# Altium PCB PCB for XH Connectors_2023-09-30.pcbdoc
Units mm, origin at the board's own origin, x right, y up, seen from the top; angles counter-clockwise.
Board outline 95.92 x 79.69 mm, 2 copper layers (Top Layer, Bottom Layer); 19 components, 37 nets, 96 pads, 4 vias.
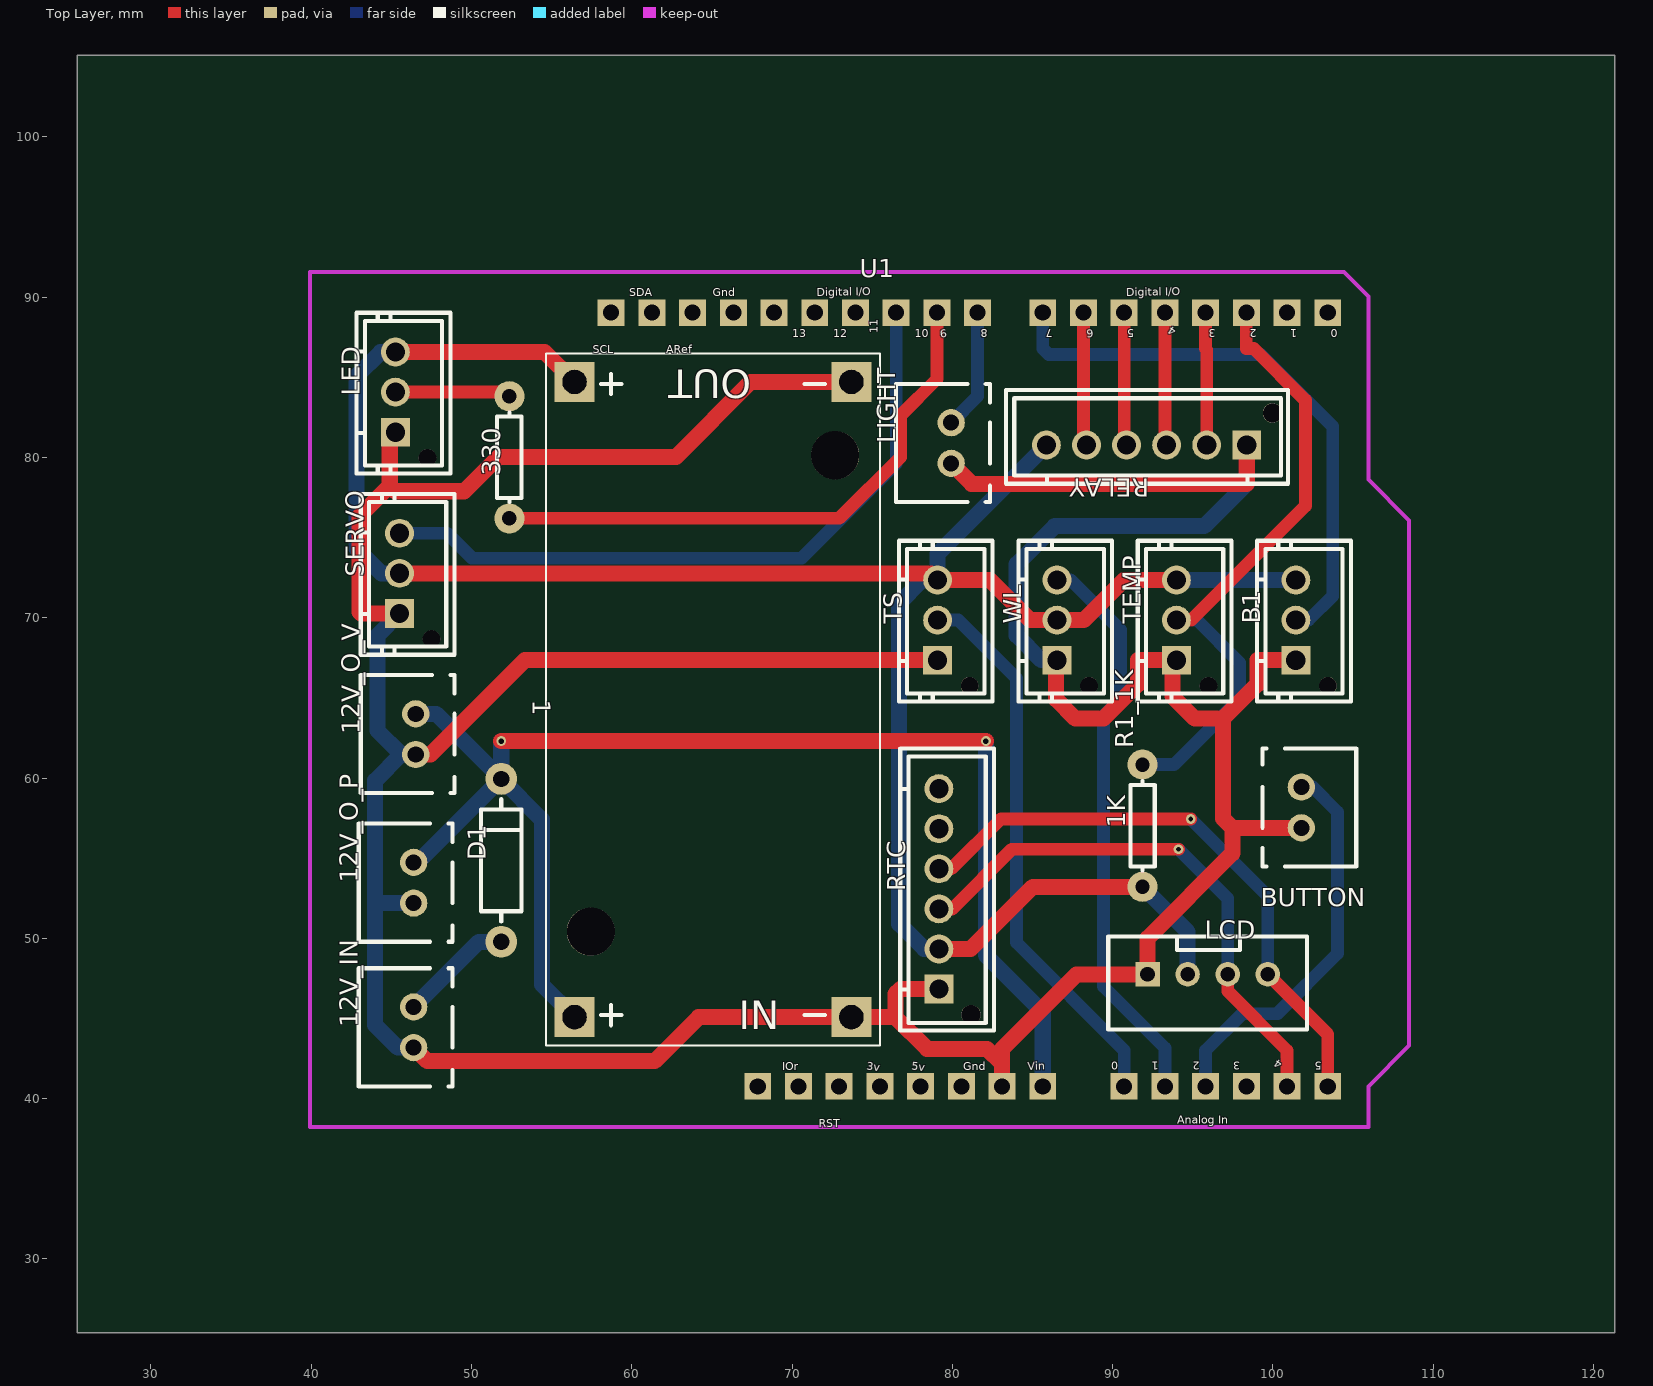
[diagram p0: Top Layer view]
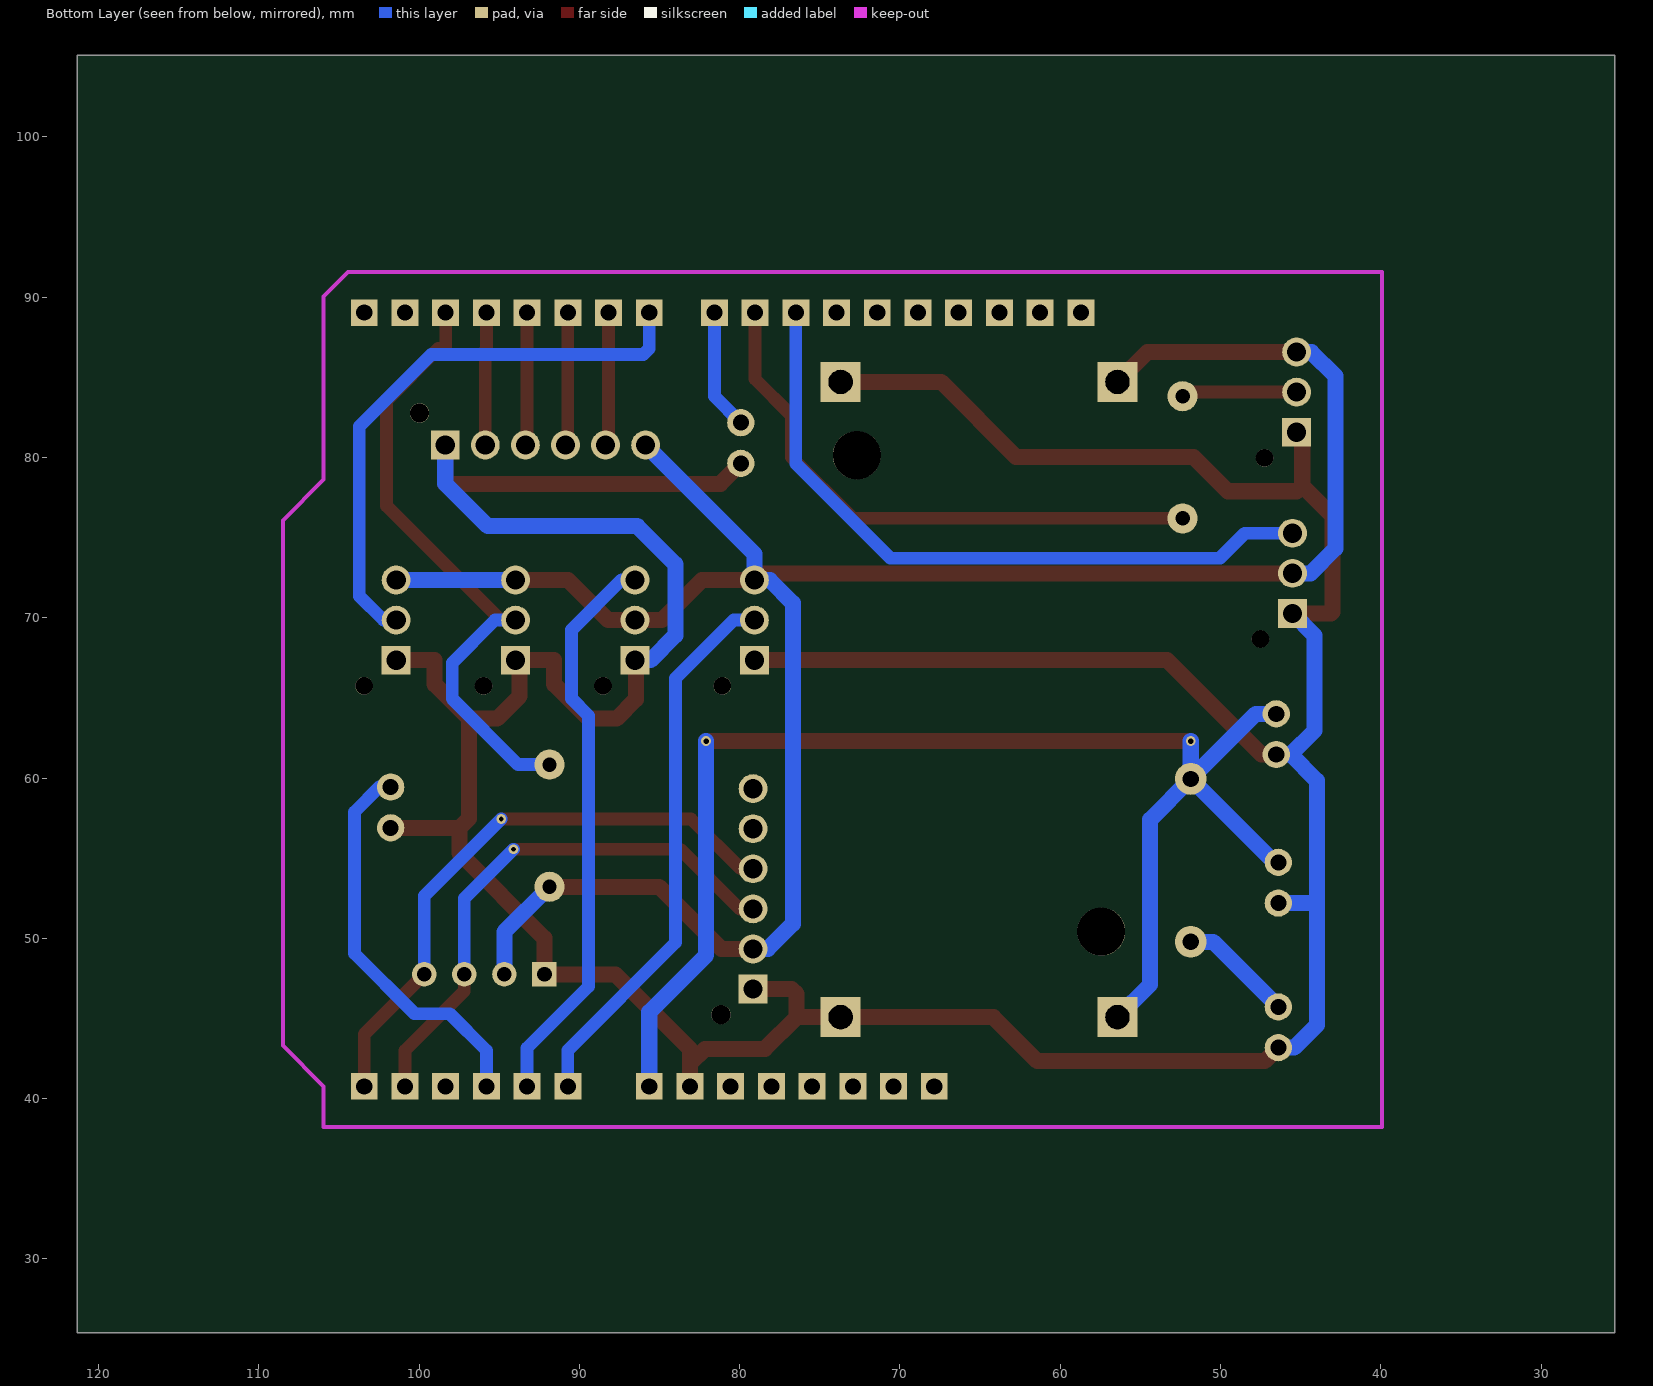
[diagram p1: Bottom Layer view, seen from below]

## Layer stack, top to bottom
Top Layer: signal copper (thickness not stored)
Dielectric: dielectric 0.32, FR-4, Dk 4.8
Bottom Layer: signal copper (thickness not stored)

## Board outline
121.323,25.4 25.4,25.4 25.4,105.093 121.323,105.093

## Components (designator, comment, footprint, x,y, rotation, side; value= is the part's Value field where it differs from the comment)
1 "DC-DC-STEP-DOWN-LM2596" DC-DC-STEP-DOWN-LM2596 65.062,64.897 r90 top
12V_IN "12V Power Supply" CONN-TH_B2B-XH-A-LF-SN 46.393,44.45 r90 top
12V_O_P "B2B-XH-A (LF)(SN)" CONN-TH_B2B-XH-A-LF-SN 46.393,53.467 r90 top
12V_O_V "B2B-XH-A (LF)(SN)" CONN-TH_B2B-XH-A-LF-SN 46.52,62.738 r90 top
330 "1k" R_AXIAL-0.3 52.362,80.01 r90 top
B1 "B3B-XH-AM-(LF)(SN)" CONN-TH_3P-P2.50_B3B-XH-AM-LF-SN 101.426,69.85 r90 top
BUTTON "PUSH Button" CONN-TH_B2B-XH-A-LF-SN 101.765,58.166 r270 top
D1 "DIODE" DIODE-1N4001 51.854,54.864 r90 top
LCD "B4B-XH-A-G" CONN-TH_B4B-XH-A-G 95.923,47.752 r0 top
LED "B3B-XH-AM-(LF)(SN)" CONN-TH_3P-P2.50_B3B-XH-AM-LF-SN 45.25,84.074 r90 top
LIGHT "B2B-XH-A (LF)(SN)" CONN-TH_B2B-XH-A-LF-SN 79.921,80.899 r90 top
R1_1K "1k" R_AXIAL-0.3 91.859,57.023 r90 top
RELAY "B6B-XH-AM" CONN-TH_6P-P2.50_B6B-XH-AM-LF-SN 92.113,80.772 r180 top
RTC "B6B-XH-AM" CONN-TH_6P-P2.50_B6B-XH-AM-LF-SN 79.159,53.086 r90 top
SERVO "B3B-XH-AM-(LF)(SN)" CONN-TH_3P-P2.50_B3B-XH-AM-LF-SN 45.504,72.771 r90 top
TEMP "B3B-XH-AM-(LF)(SN)" CONN-TH_3P-P2.50_B3B-XH-AM-LF-SN 93.976,69.85 r90 top
TS "B3B-XH-AM-(LF)(SN)" CONN-TH_3P-P2.50_B3B-XH-AM-LF-SN 79.074,69.85 r90 top
U1 "ARDUINOR3-DIMENSION" ARDUINOR3 81.064,64.897 r0 top
WL "B3B-XH-AM-(LF)(SN)" CONN-TH_3P-P2.50_B3B-XH-AM-LF-SN 86.525,69.85 r90 top

## Footprints (in the part's own frame and the unit in brackets; to place one, negate y for a bottom-side part, rotate by r counter-clockwise, add the part's x,y. Pads: shape width x height; smd on the part's side, far side on the other; paste and mask are expansions set on the pad)
ARDUINOR3 [mil]
  rect 66x66 hole 39.4: 3V(-220,-950) 5V(-120,-950) A0(380,-950) A1(480,-950) A2(580,-950) A3(680,-950) A4(780,-950) A5(880,-950) AREF(-680,950) D0(880,950) D1(780,950) D2(680,950) D3(580,950) D4(480,950) D5(380,950) D6(280,950) D7(180,950) D8(20,950) D9(-80,950) D10(-180,950) D11(-280,950) D12(-380,950) D13(-480,950) GND(-580,950) GND1(80,-950) GND2(-20,-950) IOREF(-420,-950) RESERVED(-520,-950) RESET(-320,-950) SCL(-880,950) SDA(-780,950) VIN(180,-950)
  Keep-Out Layer lines w10: -1620,-1050 980,-1050 980,-950 1080,-850 1080,440 980,540 980,990 920,1050 -1620,1050 -1620,-1050
CONN-TH_3P-P2.50_B3B-XH-AM-LF-SN [mm]
  rect 1.8x1.8 hole 1.2: 1(-2.5,0)
  round 1.8 hole 1.2: 2(0,0) 3(2.5,0)
  round 1.1 hole 1.1 unplated: ""(-4.1,-2)
  silkscreen extent -5.08,-3.43 4.95,2.41
CONN-TH_6P-P2.50_B6B-XH-AM-LF-SN [mm]
  rect 1.8x1.8 hole 1.2: 1(-6.25,0)
  round 1.8 hole 1.2: 2(-3.75,0) 3(-1.25,0) 4(1.25,0) 5(3.75,0) 6(6.25,0)
  round 1.2 hole 1.2 unplated: ""(-7.85,-2)
  silkscreen extent -8.83,-3.43 8.76,2.41
CONN-TH_B2B-XH-A-LF-SN [mm]
  round 1.7 hole 1: 1(1.27,0) 2(-1.27,0)
  silkscreen extent -3.68,-2.41 3.68,3.43
CONN-TH_B4B-XH-A-G [mil]
  rect 60x60 hole 36: 1(-147.64,0)
  round 60 hole 36: 2(-49.22,0) 3(49.21,0) 4(147.64,0)
  silkscreen extent -244,-136 244,93
DC-DC-STEP-DOWN-LM2596 [mil]
  rect 98.42x98.42 hole 59.06: IN+(-780,340) IN-(-780,-340) OUT+(780,340) OUT-(780,-340)
  round 118.1 hole 118.1 unplated: ""(-570,300) ""(600,-300)
  silkscreen extent -850,-410 850,410
DIODE-1N4001 [mil]
  round 78 hole 39.4: A(-200,0) C(200,0)
  silkscreen extent -150,-50 150,50
R_AXIAL-0.3 [mil]
  round 74 hole 35.4: 1(-150,0) 2(150,0)
  silkscreen extent -110,-30 110,30

## Via types
v1: diameter 0.61, hole 0.305, Top Layer to Bottom Layer, tented both sides, 2 vias
v2: diameter 0.61, hole 0.35, Top Layer to Bottom Layer, tented both sides, 2 vias

## Nets (pads, with @x,y where several pads share a name; then routed paths per layer and width w, separated by ;. In a path a pad name is that pad's centre, name@x,y a point inside that pad or via, vN(x,y) a via of type N, cw(c..) or ccw(c..) an arc to the next point about the centre after c; other vN are vias at no path point)
12V_IN_1: 12V_IN.1 D1.A | length 7.1
  Bottom Layer w1: 12V_IN.1 50.457,49.784 D1.A
330_1: 330.1 U1.D9 | length 35.9
  Top Layer w0.8: 330.1 72.938,76.2 76.773,80.035 76.773,82.627 79.032,84.887 U1.D9
+5V: 1.OUT+ B1.3 LCD.2 LED.3 R1_1K.1 RELAY.6 RTC.2 SERVO.2 TEMP.3 TS.3 WL.2 | length 145.5
  Top Layer w1: LED.3 54.561,86.574 1.OUT+ ; SERVO.2 78.653,72.771 TS.3 82.356,72.35 84.856,69.85 WL.2 88.194,69.85 90.694,72.35 TEMP.3 ; RTC.2 81.143,49.336 85.02,53.213 R1_1K.1
  Bottom Layer w1: LED.3 44.323,86.574 42.834,85.085 42.834,74.318 44.381,72.771 SERVO.2 ; RTC.2 78.24,49.336 76.671,50.906 76.671,70.917 78.103,72.35 TS.3 79.074,73.984 RELAY.6 ; R1_1K.1 94.673,50.399 LCD.2 ; TEMP.3 B1.3
B1_2: B1.2 U1.D7 | length 35.8
  Bottom Layer w0.8: U1.D7 85.636,86.788 86.007,86.417 99.231,86.417 103.728,81.921 103.728,71.363 102.216,69.85 B1.2
GND: 1.IN- 1.OUT- 12V_IN.2 12V_O_P.2 12V_O_V.2 B1.1 BUTTON.1 LCD.1 LED.1 LIGHT.2 RELAY.1 RTC.1 SERVO.1 TEMP.1 TS.1 U1.GND1 WL.1 | length 268.6
  Top Layer w1: LED.1 44.898,81.223 44.898,78.234 ; SERVO.1 43.103,70.271 43.005,70.369 43.005,76.341 44.899,78.234 ; 12V_IN.2 47.24,42.333 61.419,42.333 64.171,45.085 1.IN- 76.449,45.085 ; 12V_O_V.2 47.45,61.468 53.333,67.35 TS.1 ; 1.OUT- 67.43,84.709 62.745,80.024 51.671,80.024 49.536,77.889 45.243,77.889 44.899,78.234 ; RTC.1 76.758,46.836 76.449,46.526 76.449,45.085 ; LIGHT.2 81.196,78.354 98.346,78.354 98.363,78.371 RELAY.1 ; U1.GND1 83.096,42.006 83.096,42.163 ; WL.1 86.473,67.299 86.473,64.901 87.676,63.698 89.424,63.698 91.575,65.85 91.575,67.35 TEMP.1@93.717,67.35 ; TEMP.1 TEMP.1@93.717,67.35 ; B1.1 99.026,67.35 99.026,65.85 96.874,63.698 ; BUTTON.1 97.464,56.896 ; 76.449,45.085 78.426,43.107 82.152,43.107 83.096,42.163 ; 83.096,42.163 83.096,43.106 87.742,47.752 LCD.1 92.173,50.015 97.464,55.305 97.464,56.896 ; TEMP.1@93.717,67.35 93.717,65.108 95.126,63.698 96.874,63.698 ; 96.874,63.698 96.874,57.486 97.464,56.896
  Bottom Layer w1: SERVO.1 44.12,68.888 44.12,62.964 45.616,61.468 ; 12V_IN.2 45.4,43.18 43.99,44.59 43.99,52.197 ; 12V_O_P.2 43.99,52.197 ; 12V_O_V.2 45.616,61.468 ; WL.1 85.554,67.35 84.005,68.9 84.005,73.336 86.384,75.716 95.707,75.716 98.363,78.371 RELAY.1 ; 43.99,52.197 43.99,59.842 45.616,61.468
LED_2: 330.2 LED.2 | length 7.2
  Top Layer w0.8: LED.2 52.108,84.074 330.2
LIGHT_1: LIGHT.1 U1.D8 | length 7.5
  Bottom Layer w0.8: LIGHT.1 81.572,83.82 U1.D8
RELAY_2: RELAY.2 U1.D3 | length 8.3
  Top Layer w0.8: U1.D3 95.796,86.788 95.863,86.721 RELAY.2
RELAY_3: RELAY.3 U1.D4 | length 8.3
  Top Layer w0.8: U1.D4 93.256,80.879 RELAY.3
RELAY_4: RELAY.4 U1.D5 | length 8.3
  Top Layer w0.8: U1.D5 90.716,80.919 RELAY.4
RELAY_5: RELAY.5 U1.D6 | length 8.3
  Top Layer w0.8: U1.D6 88.176,80.959 RELAY.5
RTC_5: RTC.5
RTC_6: RTC.6
SCL: LCD.4 RTC.4 U1.A5 | length 37.2
  Top Layer w0.8: RTC.4 79.925,54.336 83.023,57.434 v1(94.871,57.434) ; LCD.4 103.416,44.009 U1.A5
  Bottom Layer w0.8: v1(94.871,57.434) 99.673,52.633 LCD.4
SDA: LCD.3 RTC.3 U1.A4 | length 34.1
  Top Layer w0.8: RTC.3 79.984,51.836 83.703,55.555 v1(94.109,55.555) ; LCD.3 97.173,46.709 100.876,43.006 U1.A4
  Bottom Layer w0.8: v1(94.109,55.555) 97.173,52.491 LCD.3
SERVO_3: SERVO.3 U1.D10 | length 43.5
  Bottom Layer w0.8: SERVO.3 48.484,75.271 50.039,73.715 70.585,73.715 76.492,79.622 U1.D10
TEMP_2: R1_1K.2 TEMP.2 U1.D2 | length 39.9
  Top Layer w0.8: TEMP.2 94.904,69.85 102.018,76.964 102.018,83.573 98.803,86.788 98.336,86.788 U1.D2
  Bottom Layer w0.8: R1_1K.2 93.818,60.833 97.927,64.942 97.927,67.181 95.258,69.85 TEMP.2
TS_2: TS.2 U1.A0 | length 34.7
  Bottom Layer w0.8: TS.2 80.365,69.85 83.991,66.224 83.991,49.731 90.716,43.006 U1.A0
U1_3V: U1.3V
U1_5V: U1.5V
U1_A2: BUTTON.2 U1.A2 | length 24.7
  Bottom Layer w0.8: U1.A2 95.796,43.006 98.078,45.288 100.272,45.288 104.028,49.045 104.028,57.885 102.477,59.436 BUTTON.2
U1_A3: U1.A3
U1_AREF: U1.AREF
U1_D0: U1.D0
U1_D1: U1.D1
U1_D11: U1.D11
U1_D12: U1.D12
U1_D13: U1.D13
U1_GND: U1.GND
U1_GND2: U1.GND2
U1_IOREF: U1.IOREF
U1_RESERVED: U1.RESERVED
U1_RESET: U1.RESET
U1_SCL: U1.SCL
U1_SDA: U1.SDA
VCC: 1.IN+ 12V_O_P.1 12V_O_V.1 D1.C U1.VIN | length 87
  Top Layer w1: v2(51.854,62.305) v2(82.089,62.305)
  Bottom Layer w1: 12V_O_P.1 46.647,54.737 D1.C ; 12V_O_V.1 47.79,64.008 D1.C ; v2(51.854,62.305) D1.C ; 1.IN+ 54.393,47.118 54.393,57.405 D1.C ; v2(82.089,62.305) 82.089,48.943 85.636,45.396 U1.VIN
WL_3: U1.A1 WL.3 | length 35.7
  Bottom Layer w0.8: WL.3 87.377,72.35 90.476,69.25 90.476,64.942 89.424,63.889 89.424,46.995 93.256,43.163 U1.A1
pads on no net: 1. B1. LED. RELAY. RTC. SERVO. TEMP. TS. WL.

## Silkscreen, mask and mechanical layers (free items; w line width, h text height)
Top Overlay:
  text "1K" at 90.78,56.896 h1.14 r90

## Text inside footprints (layer, text, board x,y; h text height)
1: Top Overlay "IN" at 66.662,44.323 h1.78; Top Overlay "OUT" at 67.462,85.471 h1.78 r180
U1: Top Overlay "RST" at 71.666,38.227 h0.51; Top Overlay "3v" at 74.632,41.785 h0.51 r353; Top Overlay "5v" at 77.426,41.785 h0.51 r353; Top Overlay "Gnd" at 80.683,41.783 h0.51; Top Overlay "Vin" at 84.705,41.783 h0.51 r2; Top Overlay "Analog In" at 94.018,38.43 h0.51; Top Overlay "0" at 90.335,42.291 h0.51 r180; Top Overlay "1" at 92.875,42.291 h0.51 r180; Top Overlay "2" at 95.415,42.291 h0.51 r180; Top Overlay "3" at 97.955,42.291 h0.51 r180; Top Overlay "4" at 100.641,42.245 h0.51 r145; Top Overlay "5" at 103.035,42.291 h0.51 r180; Top Overlay "ARef" at 62.141,86.487 h0.51; Top Overlay "Gnd" at 65.062,90.043 h0.51; Top Overlay "13" at 70.015,87.503 h0.51; Top Overlay "12" at 72.555,87.503 h0.51; Top Overlay "11" at 75.349,87.757 h0.51 r90; Top Overlay "10" at 77.635,87.503 h0.51; Top Overlay "9" at 79.645,88.01 h0.51 r185; Top Overlay "8" at 82.207,88.011 h0.51 r180; Top Overlay "7" at 86.271,88.011 h0.51 r180; Top Overlay "6" at 88.789,88.01 h0.51 r185; Top Overlay "5" at 91.351,88.011 h0.51 r180; Top Overlay "4" at 94.037,87.965 h0.51 r145; Top Overlay "3" at 96.431,88.011 h0.51 r180; Top Overlay "2" at 98.971,88.011 h0.51 r180; Top Overlay "1" at 101.511,88.011 h0.51 r180; Top Overlay "0" at 104.051,88.011 h0.51 r180; Top Overlay "Digital I/O" at 71.543,90.043 h0.51 r1; Top Overlay "Digital I/O" at 90.847,90.043 h0.51 r1; Top Overlay "SCL" at 57.569,86.487 h0.51; Top Overlay "SDA" at 59.855,90.043 h0.51; Top Overlay "IOr" at 69.38,41.783 h0.51